# EAGLE board led16x16 (EAGLE 5.06)
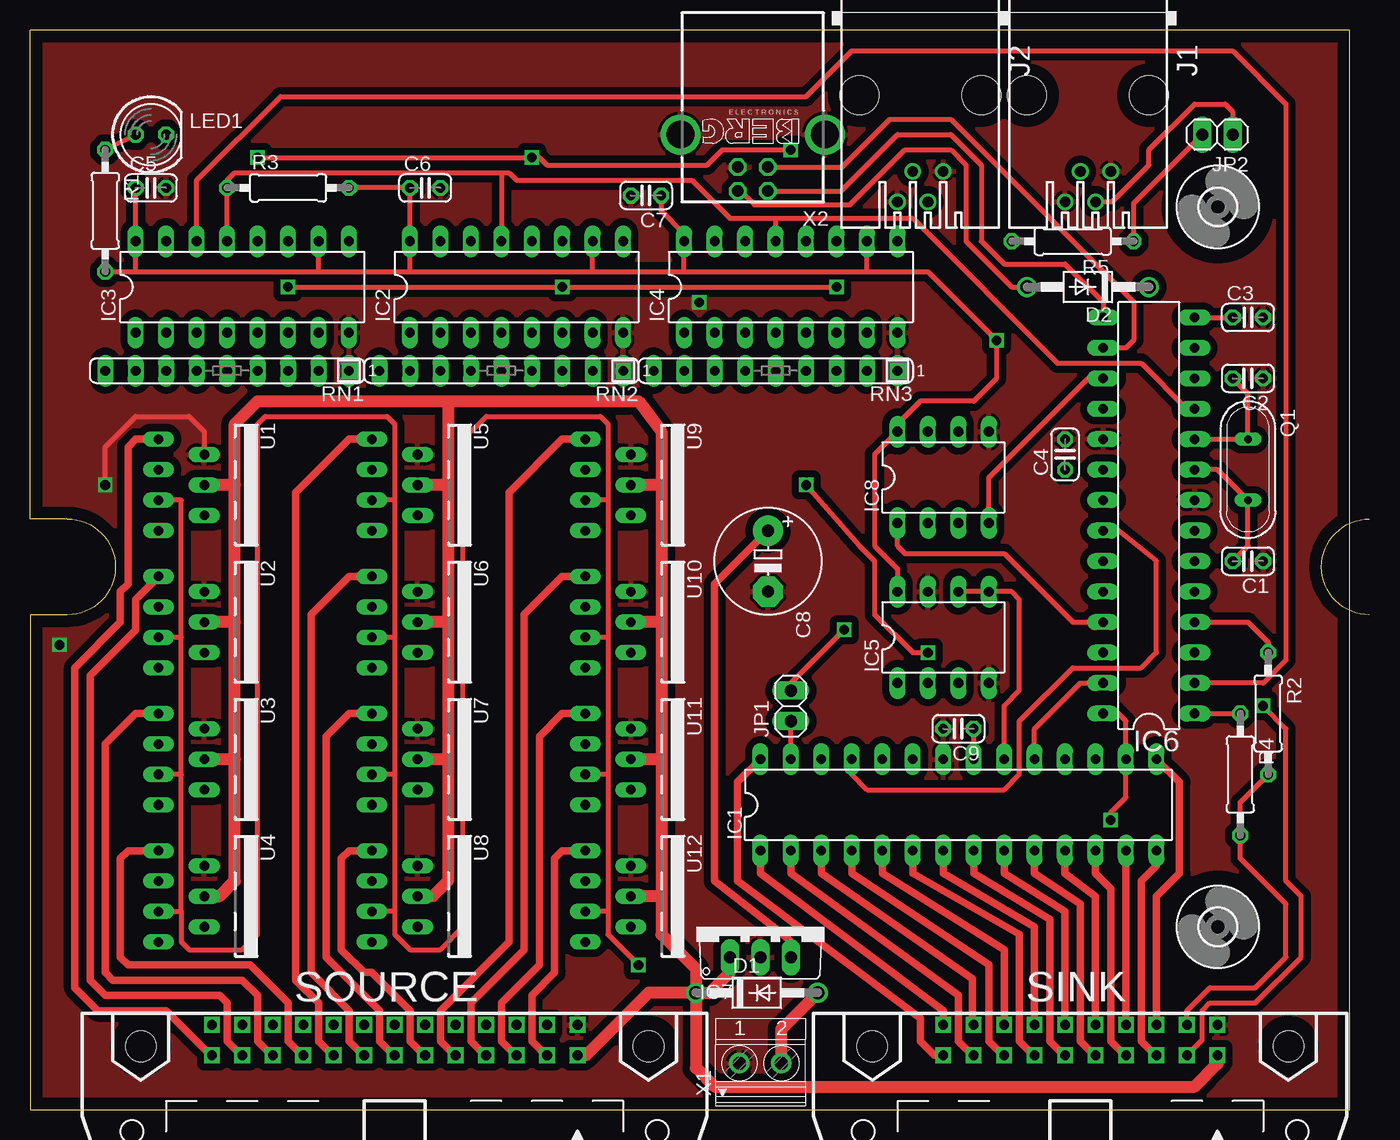
[diagram p0: board, top side]
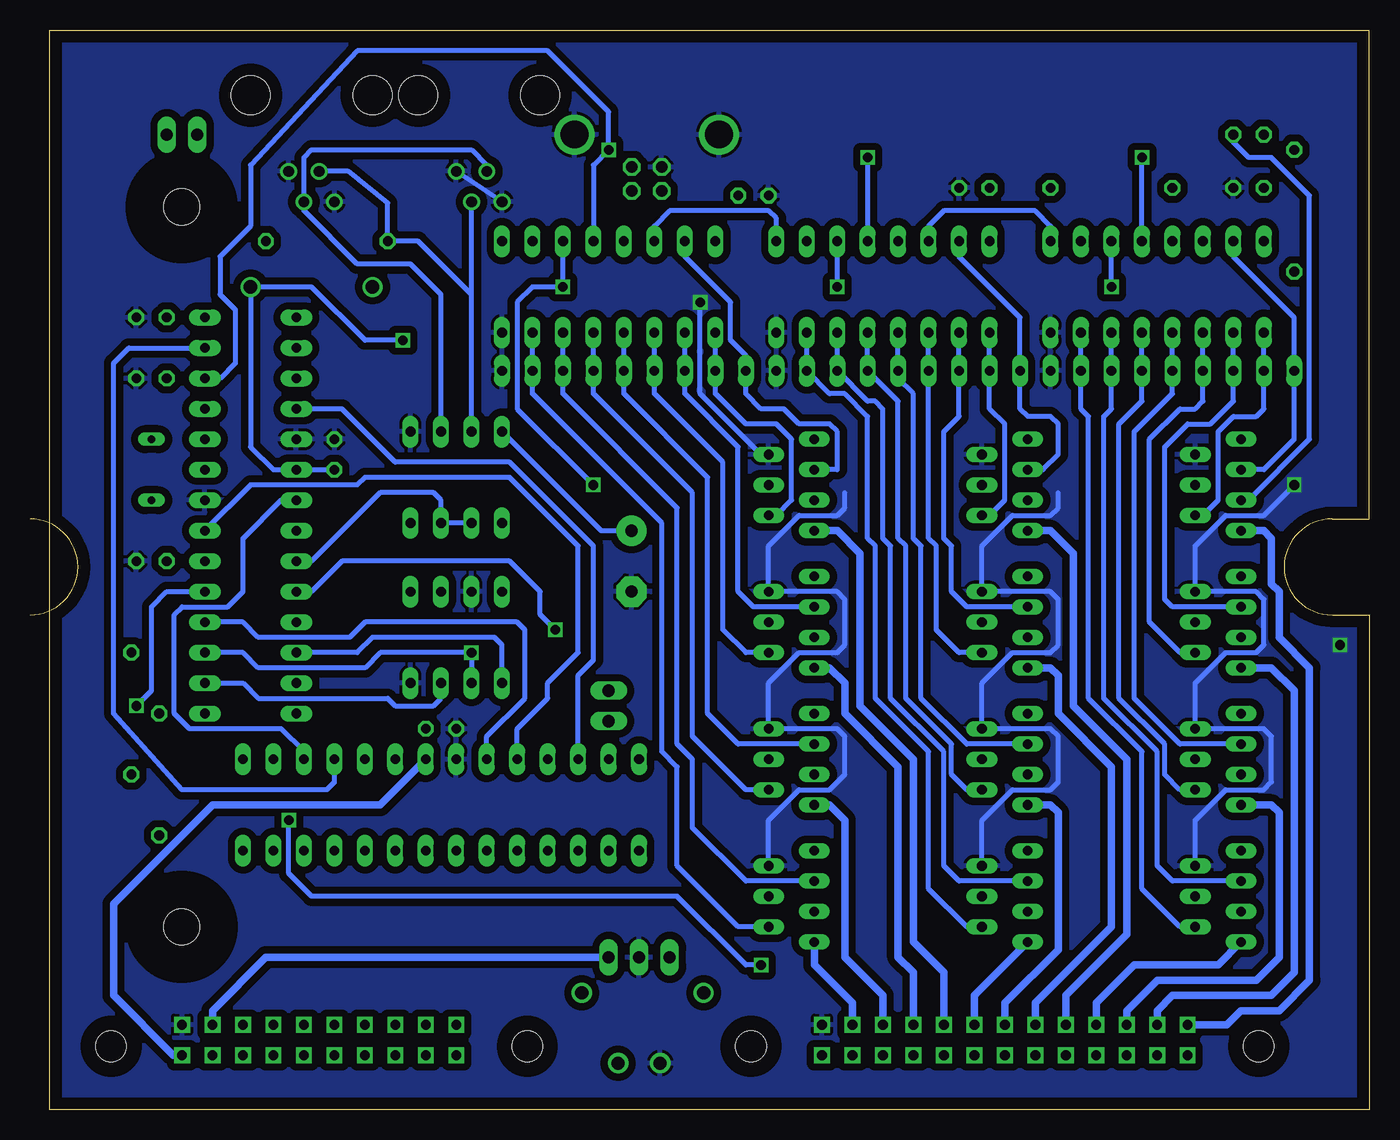
[diagram p1: board, bottom side, seen from below]

Size 111.66 x 90 mm. Coordinates in mm from the lower left corner, seen from the top.
Outline: 111.66,41.24 arc-180 111.66,49.24
Outline: 0,0 110,0 110,90 0,90 0,49.24 3.12,49.24 arc-180 3.12,41.24 0,41.24 0,0
Copper layers (1*16): Top 0.035mm / dielectric 1.5mm / Bottom 0.035mm
Design rules "10mils": minimum track width 10mil, minimum drill 24mil, track to track 10mil, track to pad 10mil, pad to pad 10mil, via to via 10mil, smd to smd 10mil, copper to edge 40mil, drill to drill 10mil, minimum pad ring 10mil, minimum via ring 8mil, stop-mask expansion 0mil, vias tented up to drill 0mil, thermal gap 10mil

## Footprints (pad centres in the part's own frame; a part is rotated, then mirrored left to right if it is on the bottom)
C025-024X044 = drill 0.813 octagon: 1 -1.27,0; 2 1.27,0
E5-8,5 = drill 1.016 pad 2.54 round: + -2.54,0 | drill 1.016 pad 2.54 octagon: - 2.54,0
DO41-10 = drill 1.118 round: A 5.08,0; C -5.08,0
3,0 = hole 3: 0,0
IC-PACKAGE_DIL28-3 = drill 0.813 long: 1 -16.51,-3.81; 2 -13.97,-3.81; 3 -11.43,-3.81; 4 -8.89,-3.81; 5 -6.35,-3.81; 6 -3.81,-3.81; 7 -1.27,-3.81; 8 1.27,-3.81; 9 3.81,-3.81; 10 6.35,-3.81; 11 8.89,-3.81; 12 11.43,-3.81; 13 13.97,-3.81; 14 16.51,-3.81; 15 16.51,3.81; 16 13.97,3.81; 17 11.43,3.81; 18 8.89,3.81; 19 6.35,3.81; 20 3.81,3.81; 21 1.27,3.81; 22 -1.27,3.81; 23 -3.81,3.81; 24 -6.35,3.81; 25 -8.89,3.81; 26 -11.43,3.81; 27 -13.97,3.81; 28 -16.51,3.81
DIL16 = drill 0.813 long: 1 -8.89,-3.81; 2 -6.35,-3.81; 3 -3.81,-3.81; 4 -1.27,-3.81; 5 1.27,-3.81; 6 3.81,-3.81; 7 6.35,-3.81; 8 8.89,-3.81; 9 8.89,3.81; 10 6.35,3.81; 11 3.81,3.81; 12 1.27,3.81; 13 -1.27,3.81; 14 -3.81,3.81; 15 -6.35,3.81; 16 -8.89,3.81
DIL08 = drill 0.813 long: 1 -3.81,-3.81; 2 -1.27,-3.81; 3 1.27,-3.81; 4 3.81,-3.81; 5 3.81,3.81; 6 1.27,3.81; 7 -1.27,3.81; 8 -3.81,3.81
DIL28-3 = drill 0.813 long: 1 -16.51,-3.81; 2 -13.97,-3.81; 3 -11.43,-3.81; 4 -8.89,-3.81; 5 -6.35,-3.81; 6 -3.81,-3.81; 7 -1.27,-3.81; 8 1.27,-3.81; 9 3.81,-3.81; 10 6.35,-3.81; 11 8.89,-3.81; 12 11.43,-3.81; 13 13.97,-3.81; 14 16.51,-3.81; 15 16.51,3.81; 16 13.97,3.81; 17 11.43,3.81; 18 8.89,3.81; 19 6.35,3.81; 20 3.81,3.81; 21 1.27,3.81; 22 -1.27,3.81; 23 -3.81,3.81; 24 -6.35,3.81; 25 -8.89,3.81; 26 -11.43,3.81; 27 -13.97,3.81; 28 -16.51,3.81
TO220V = drill 1.016 long: 1 -2.54,-2.54; 2 0,-2.54; 3 2.54,-2.54
520250-2 = drill 0.889 round: 1 -1.905,6.35; 2 -0.635,8.89; 3 0.635,6.35; 4 1.905,8.89 | hole 3.251: -5.08,0; 5.08,0
1X02 = drill 1.016 long: 1 -1.27,0; 2 1.27,0
LED5MM = drill 0.813 octagon: A -1.27,0; K 1.27,0
QS = drill 0.61 long: 1 -2.54,0; 2 2.54,0
0207/10 = drill 0.813 octagon: 1 -5.08,0; 2 5.08,0
SIL9 = drill 0.813 long: 1 -10.16,0; 2 -7.62,0; 3 -5.08,0; 4 -2.54,0; 5 0,0; 6 2.54,0; 7 5.08,0; 8 7.62,0; 9 10.16,0
3M_20L = drill 0.813 square: 1 -11.43,-5.08; 2 -11.43,-2.54; 3 -8.89,-5.08; 4 -8.89,-2.54; 5 -6.35,-5.08; 6 -6.35,-2.54; 7 -3.81,-5.08; 8 -3.81,-2.54; 9 -1.27,-5.08; 10 -1.27,-2.54; 11 1.27,-5.08; 12 1.27,-2.54; 13 3.81,-5.08; 14 3.81,-2.54; 15 6.35,-5.08; 16 6.35,-2.54; 17 8.89,-5.08; 18 8.89,-2.54; 19 11.43,-5.08; 20 11.43,-2.54 | hole 2.54: -17.348,-3.277; 17.348,-3.277
3M_26L = drill 0.813 square: 1 -15.24,-5.08; 2 -15.24,-2.54; 3 -12.7,-5.08; 4 -12.7,-2.54; 5 -10.16,-5.08; 6 -10.16,-2.54; 7 -7.62,-5.08; 8 -7.62,-2.54; 9 -5.08,-5.08; 10 -5.08,-2.54; 11 -2.54,-5.08; 12 -2.54,-2.54; 13 0,-5.08; 14 0,-2.54; 15 2.54,-5.08; 16 2.54,-2.54; 17 5.08,-5.08; 18 5.08,-2.54; 19 7.62,-5.08; 20 7.62,-2.54; 21 10.16,-5.08; 22 10.16,-2.54; 23 12.7,-5.08; 24 12.7,-2.54; 25 15.24,-5.08; 26 15.24,-2.54 | hole 2.54: -21.158,-3.277; 21.158,-3.277
ITS621L1 = drill 0.8 long: 1 -3.81,-8.255; 2 -2.54,-4.445; 3 -1.27,-8.255; 4 0,-4.445; 5 1.27,-8.255; 6 2.54,-4.445; 7 3.81,-8.255
1751248 = drill 1.1 pad 1.7 round: 1 -1.75,-0.1; 2 1.75,-0.1
PN61729-S = drill 0.95 octagon: 1 1.25,4.71; 2 -1.25,4.71; 3 -1.25,2.71; 4 1.25,2.71 | drill 2.3 pad 2.9 round: S1 -6.02,0; S2 6.02,0

## Placement (x,y rotation side)
C1  15pF  [C025-024X044]  101.52,45.72 180 top
C2  15pF  [C025-024X044]  101.52,60.96 180 top
C3  100nF  [C025-024X044]  101.52,66.04 0 top
C4  100nF  [C025-024X044]  86.28,54.61 90 top
C5  100nF  [C025-024X044]  10.08,76.83 0 top
C6  100nF  [C025-024X044]  32.94,76.83 0 top
C7  100nF  [C025-024X044]  51.35,76.2 180 top
C8  4.7uF  [E5-8,5]  61.52,45.72 270 top
C9  100nF  [C025-024X044]  77.39,31.75 180 top
D1  BAT49  [DO41-10]  60.58,9.74 0 top
D2  BAT49  [DO41-10]  88.19,68.58 180 top
H1  MOUNT-HOLE3.0  [3,0]  99,15.24 0 top
H3  MOUNT-HOLE3.0  [3,0]  99,75.25 0 top
IC1  TLC5940  [IC-PACKAGE_DIL28-3]  77.39,25.4 0 top
IC2  74HCT595N  [DIL16]  40.56,68.58 0 top
IC3  74HCT595N  [DIL16]  17.7,68.58 0 top
IC4  74HCT595N  [DIL16]  63.42,68.58 0 top
IC5  MCP4161P  [DIL08]  76.12,39.37 0 top
IC6  PIC18F2550_28DIP  [DIL28-3]  93.27,49.53 90 top
IC7  7805TV  [TO220V]  60.88,15.24 0 top
IC8  LTC485N  [DIL08]  76.12,52.7 0 top
J1  RS485  [520250-2]  88.19,84.56 180 top
J2  RS485  [520250-2]  74.22,84.56 180 top
JP1  VPRG  [1X02]  63.42,33.66 90 top
JP2  rs485  [1X02]  98.98,81.28 180 top
LED1  [LED5MM]  10.08,81.28 0 top
Q1  20MHz  [QS]  101.52,53.34 270 top
R1  470  [0207/10]  6.27,74.93 270 top
R2  10k  [0207/10]  103.2,33.02 270 top
R3  10k  [0207/10]  21.51,76.83 0 top
R4  10k  [0207/10]  100.89,27.94 270 top
R5  10k  [0207/10]  86.92,72.39 180 top
RN1  10k  [SIL9]  16.43,61.59 180 top
RN2  10k  [SIL9]  39.29,61.59 180 top
RN3  10k  [SIL9]  62.15,61.59 180 top
SINK  [3M_20L]  87.55,2 180 top
SOURCE  [3M_26L]  30.4,2 180 top
U1  ITS621L1  [ITS621L1]  18.97,52.07 270 top
U2  ITS621L1  [ITS621L1]  18.97,40.64 270 top
U3  ITS621L1  [ITS621L1]  18.97,29.21 270 top
U4  ITS621L1  [ITS621L1]  18.97,17.78 270 top
U5  ITS621L1  [ITS621L1]  36.75,52.07 270 top
U6  ITS621L1  [ITS621L1]  36.75,40.64 270 top
U7  ITS621L1  [ITS621L1]  36.75,29.21 270 top
U8  ITS621L1  [ITS621L1]  36.75,17.78 270 top
U9  ITS621L1  [ITS621L1]  54.53,52.07 270 top
U10  ITS621L1  [ITS621L1]  54.53,40.64 270 top
U11  ITS621L1  [ITS621L1]  54.53,29.21 270 top
U12  ITS621L1  [ITS621L1]  54.53,17.78 270 top
X1  1751248  [1751248]  60.88,3.97 0 top
X2  PN61729-S  [PN61729-S]  60.24,81.28 180 top

## Library data of the parts
C1-C7 C9 R1-R5 = rcl2
C8 = rcl
D1 D2 = diode
H1 H3 = holes
IC1 = TLC5940
IC2-IC4 = 74xx-eu
IC5 = MCP4161
IC6 = microchip
IC7 = linear
IC8 = linear-technology; OC_FARNELL: unknown; OC_NEWARK: unknown
J1 J2 = con-amp
JP1 JP2 = pinhead-2
LED1 = led
Q1 = special
RN1-RN3 = resistor-sil
SINK = con-harting-ml; OC_FARNELL: unknown; OC_NEWARK: unknown
SOURCE = con-harting-ml
U1-U12 = ITS621L1
X1 = con-phoenix-350
X2 = con-berg

## Nets
!FAULT: IC1.16 IC6.28 LED1.K U1.5 U2.5 U3.5 U4.5 U5.5 U6.5 U7.5 U8.5 U9.5 U10.5 U11.5 U12.5
+5V: C4.1 C5.1 C6.1 C7.1 C8.+ D2.C IC2.10 IC2.16 IC3.10 IC3.16 IC4.10 IC4.16 IC5.8 IC6.20 IC7.3 IC8.8 R1.2 R2.2 R3.2 R4.2 SINK.3
BLANK: IC1.23 IC6.4 R2.1
D+: IC6.16 X2.3
D-: IC6.15 X2.2
DCPRG: IC1.19 IC6.27
DE/!RE: IC6.23 IC8.2 IC8.3
EXT: IC6.5 SINK.4
GND: C1.1 C2.1 C3.2 C4.2 C5.2 C6.2 C7.2 C8.- C9.2 IC1.22 IC2.8 IC3.8 IC4.8 IC5.4 IC5.7 IC6.8 IC6.19 IC7.2 IC8.5 J1.1 J1.4 J2.1 J2.4 RN1.1 RN2.1 RN3.1 SINK.1 SOURCE.1 U1.2 U2.2 U3.2 U4.2 U5.2 U6.2 U7.2 U8.2 U9.2 U10.2 U11.2 U12.2 X1.1 X2.4 X2.S1 X2.S2
GSCLK: IC1.18 IC6.13
IREF: IC1.20 IC5.5 IC5.6
N$1: D1.A X1.2
N$2: IC2.15 RN2.9 U5.3
N$3: IC3.15 RN1.9 U1.3
N$4: IC3.1 RN1.8 U1.6
N$5: IC3.2 RN1.7 U2.3
N$6: IC3.3 RN1.6 U2.6
N$7: IC3.7 RN1.2 U4.6
N$8: IC3.6 RN1.3 U4.3
N$9: IC3.5 RN1.4 U3.6
N$10: IC3.4 RN1.5 U3.3
N$11: IC2.1 RN2.8 U5.6
N$12: IC2.2 RN2.7 U6.3
N$13: IC2.3 RN2.6 U6.6
N$14: IC2.4 RN2.5 U7.3
N$15: IC2.5 RN2.4 U7.6
N$16: IC2.6 RN2.3 U8.3
N$17: IC2.7 RN2.2 U8.6
N$18: IC4.3 RN3.6 U10.6
N$19: IC4.2 RN3.7 U10.3
N$20: IC4.1 RN3.8 U9.6
N$21: IC4.15 RN3.9 U9.3
N$22: IC4.4 RN3.5 U11.3
N$23: IC4.5 RN3.4 U11.6
N$24: IC4.6 RN3.3 U12.3
N$25: IC4.7 RN3.2 U12.6
N$26: C3.1 IC6.14
N$27: IC2.9 IC4.14
N$28: IC2.14 IC3.9
N$29: D2.A X2.1
N$30: IC1.27 JP1.1
N$31: IC6.1 R4.1
N$32: IC8.6 J1.2 J2.3 JP2.1
N$33: IC8.7 J1.3 J2.2 R5.2
N$34: JP2.2 R5.1
N$35: C1.2 IC6.9 Q1.2
N$36: C2.2 IC6.10 Q1.1
N$37: LED1.A R1.1
OUT0: IC1.28 SINK.20
OUT1: IC1.1 SINK.19
OUT2: IC1.2 SINK.18
OUT3: IC1.3 SINK.17
OUT4: IC1.4 SINK.16
OUT5: IC1.5 SINK.15
OUT6: IC1.6 SINK.14
OUT7: IC1.7 SINK.13
OUT8: IC1.8 SINK.12
OUT9: IC1.9 SINK.11
OUT10: IC1.10 SINK.10
OUT11: IC1.11 SINK.9
OUT12: IC1.12 SINK.8
OUT13: IC1.13 SINK.7
OUT14: IC1.14 SINK.6
OUT15: IC1.15 SINK.5
POT_!CS: IC5.1 IC6.26
RAW0: SOURCE.26 U1.1
RAW1: SOURCE.25 U1.7
RAW2: SOURCE.24 U2.1
RAW3: SOURCE.23 U2.7
RAW4: SOURCE.22 U3.1
RAW5: SOURCE.21 U3.7
RAW6: SOURCE.20 U4.1
RAW7: SOURCE.19 U4.7
RAW8: SOURCE.18 U5.1
RAW9: SOURCE.17 U5.7
RAW10: SOURCE.16 U6.1
RAW11: SOURCE.15 U6.7
RAW12: SOURCE.14 U7.1
RAW13: SOURCE.13 U7.7
RAW14: SOURCE.12 U8.1
RAW15: SOURCE.11 U8.7
RAW16: SOURCE.10 U9.1
RAW17: SOURCE.9 U9.7
RAW18: SOURCE.8 U10.1
RAW19: SOURCE.7 U10.7
RAW20: SOURCE.6 U11.1
RAW21: SOURCE.5 U11.7
RAW22: SOURCE.4 U12.1
RAW23: SOURCE.3 U12.7
RAW_!OE: IC2.13 IC3.13 IC4.13 IC6.11 R3.1
RAW_RCK: IC2.12 IC3.12 IC4.12 IC6.12
RX: IC6.25 IC8.1
SCK: IC1.25 IC6.22
SCK2: IC2.11 IC3.11 IC4.11 IC5.2 IC6.3
SDI: IC1.17 IC6.21
SDO: IC1.26 IC6.18
SDO2: IC3.14 IC5.3 IC6.2
TX: IC6.17 IC8.4
VCC: C9.1 D1.C IC1.21 IC7.1 SINK.2 SOURCE.2 U1.4 U2.4 U3.4 U4.4 U5.4 U6.4 U7.4 U8.4 U9.4 U10.4 U11.4 U12.4
VPRG: IC6.24 JP1.2
XLAT: IC1.24 IC6.7

## Tracks (layer width: path | path; a pad name or v marks a point on that pad's centre or on a via)
!FAULT  (via drill 0.8)
  Top 0.406: 12.62,27.94 12.62,39.37 | 12.62,39.37 12.62,50.8 U1.5 | 48.18,50.8 48.18,57.15 47.55,57.78 38.02,57.78 36.11,55.88 36.11,15.24 34.21,13.34 31.67,13.34 30.4,14.61 30.4,16.51 | 48.18,50.8 48.18,39.37 | 48.18,39.37 48.18,27.94 | 30.4,50.8 30.4,57.15 29.77,57.78 19.61,57.78 18.97,57.15 18.97,14.61 17.7,13.34 13.26,13.34 12.62,13.97 12.62,16.51 | 30.4,50.8 30.4,39.37 | 30.4,39.37 30.4,27.94 | 30.4,27.94 30.4,16.51 | 12.62,16.51 12.62,27.94 | 48.18,27.94 U11.5 | 48.18,39.37 U10.5 | 48.18,50.8 U9.5 | 12.62,39.37 U2.5 | 12.62,27.94 U3.5 | 30.4,50.8 U5.5 | 30.4,39.37 U6.5 | 30.4,27.94 U7.5 | 30.4,16.51 U8.5 | 48.18,27.94 48.18,16.51 | 48.18,16.51 48.18,14.61 v50.72,12.06 | 48.18,16.51 U12.5 | IC6.28 90.72,33.02 91.36,32.38 IC1.16 91.36,26.04 90.09,24.77 v90.09,24.13 | U4.5 12.62,16.51
  Bottom 0.406: v50.72,12.06 51.99,12.06 57.7,17.78 88.19,17.78 90.09,19.68 v90.09,24.13 | LED1.K 11.35,80.64 10.08,79.38 8.18,79.38 5,76.2 5,55.88 10.08,50.8 U1.5
+5V  (via drill 0.8)
  Top 0.406: 24.05,69.85 31.67,69.85 | 31.67,69.85 46.91,69.85 | 46.91,69.85 54.53,69.85 | 54.53,69.85 69.77,69.85 | 69.77,69.85 IC4.10 | 54.53,69.85 IC4.16 54.53,73.03 52.62,74.93 C7.1 | 24.05,69.85 IC3.10 | 46.91,69.85 IC2.10 | 31.67,69.85 IC2.16 C6.1 R3.2 | C5.1 IC3.16 8.81,69.85 | 69.77,69.85 74.85,69.85 v80.56,64.14 80.56,60.96 78.66,59.05 74.22,59.05 72.31,57.15 IC8.8 70.41,54.61 70.41,46.99 72.31,45.09 IC5.8 | R2.2 100.89,25.62 R4.2 100.89,20.95 104.69,17.14 104.69,12.7 102.16,10.16 98.34,10.16 96.44,8.26 SINK.3 | 8.81,69.85 24.05,69.85 | R1.2 8.81,69.85
  Top 0.61: IC7.3 63.42,13.97 62.78,14.61 57.07,19.05 57.07,43.81 C8.+
  Bottom 0.406: C4.1 IC6.20 91.36,53.34 93.27,55.24 D2.C 88.19,68.58 83.74,64.14 v80.56,64.14 | C8.+ 64.06,48.26 IC8.8
  Bottom 0.61: IC7.3 92,12.7 96.44,8.26 SINK.3
BLANK
  Top 0.406: R2.1 103.2,38.95 101.52,40.64 IC6.4
  Bottom 0.406: IC6.4 93.9,40.64 92.63,39.37 85.01,39.37 83.74,40.64 71.04,40.64 70.41,40.01 70.41,34.29 73.58,31.11 IC1.23
D+
  Top 0.406: IC6.16 91.36,63.5 92,64.14 92,67.31 76.75,82.55 71.67,82.55 67.69,78.57 X2.3
D-
  Top 0.406: IC6.15 89.45,67.31 86.28,70.48 81.2,70.48 79.3,72.39 79.3,78.74 76.75,81.28 72.31,81.28 67.6,76.57 X2.2
DCPRG
  Top 0.406: IC1.19 83.74,31.75 87.55,35.56 IC6.27
DE/!RE
  Bottom 0.406: IC8.2 IC8.3 77.39,50.8 78.03,51.44 82.47,51.44 88.19,45.72 IC6.23
EXT  (via drill 0.8)
  Top 0.406: v102.79,33.66 104.69,31.75 104.69,19.05 105.97,17.78 105.97,12.7 102.16,8.89 98.34,8.89 97.71,8.26 97.71,5.81 SINK.4
  Bottom 0.406: IC6.5 100.25,43.18 101.52,41.91 101.52,34.92 v102.79,33.66
GND  (via drill 0.8)
  Top 0.406: v6.27,52.07 6.27,55.24 8.81,57.78 13.26,57.78 14.53,56.52 U1.2
  Bottom 0.406: U4.2 14.53,24.13 11.98,26.67 8.81,26.67 8.18,27.3 8.18,31.11 8.81,31.75 U3.2 14.53,35.56 11.98,38.1 9.45,38.1 8.81,38.73 8.81,42.55 9.45,43.18 U2.2 14.53,46.99 11.98,49.53 8.81,49.53 v6.27,52.07 | U8.2 32.3,24.13 29.77,26.67 26.59,26.67 25.95,27.3 25.95,31.11 26.59,31.75 U7.2 32.3,35.56 29.77,38.1 26.59,38.1 25.95,38.73 25.95,42.55 26.59,43.18 U6.2 32.3,46.99 29.77,49.53 26.59,49.53 25.95,50.16 25.95,51.44 | U12.2 50.09,24.13 47.55,26.67 45.01,26.67 43.73,27.94 43.73,31.11 44.37,31.75 U11.2 50.09,35.56 47.55,38.1 44.37,38.1 43.73,38.73 43.73,42.55 44.37,43.18 U10.2 50.09,46.99 47.55,49.53 44.37,49.53 43.73,50.16 43.73,51.44 | U9.2 50.72,54.61 55.8,59.69 v55.8,67.31 | J2.4 J2.1
  other vias: 2.46,38.73
  pour Bottom (isolate 0.61): 0,90 0,0 110,0 110,90
  pour Top (isolate 0.61): 0,90 0,0 110,0 110,90
GSCLK
  Bottom 0.406: IC6.13 103.42,63.5 104.69,62.23 104.69,33.02 98.98,26.67 86.92,26.67 86.28,27.3 IC1.18
IREF
  Top 0.406: IC5.6 IC5.5 81.83,43.18 82.47,42.55 82.47,34.92 81.2,33.66 IC1.20
N$1
  Top 1.016: X1.2 62.63,6.71 D1.A
N$2
  Bottom 0.406: U5.3 27.23,53.34 25.95,54.61 25.95,57.15 26.59,57.78 28.5,57.78 29.13,58.42 RN2.9 29.13,66.04 34.21,71.12 IC2.15
N$3
  Bottom 0.406: U1.3 8.81,53.34 6.27,55.88 RN1.9 6.27,66.04 11.35,71.12 IC3.15
N$4
  Bottom 0.406: U1.6 13.89,49.53 12.62,50.8 12.62,56.52 11.35,57.78 9.45,57.78 8.81,58.42 RN1.8 IC3.1
N$5
  Bottom 0.406: U2.3 16.43,41.91 17.06,42.55 17.06,55.24 15.16,57.15 13.26,57.15 11.35,59.05 RN1.7 IC3.2
N$6
  Bottom 0.406: U2.6 15.79,38.1 18.34,40.64 18.34,55.88 15.79,58.42 14.53,58.42 13.89,59.05 RN1.6 IC3.3
N$7
  Bottom 0.406: U4.6 15.79,15.24 18.97,18.41 18.97,29.84 23.41,34.29 23.41,57.78 24.05,58.42 RN1.2 IC3.7
N$8
  Bottom 0.406: U4.3 16.43,19.05 17.7,20.32 17.7,29.84 22.14,34.29 22.14,57.78 21.51,58.42 RN1.3 IC3.6
N$9
  Bottom 0.406: U3.6 15.79,26.67 17.06,27.94 17.06,30.48 20.88,34.29 20.88,57.15 18.97,59.05 RN1.4 IC3.5
N$10
  Bottom 0.406: U3.3 15.79,30.48 19.61,34.29 19.61,56.52 16.43,59.69 RN1.5 IC3.4
N$11
  Bottom 0.406: U5.6 31.67,49.53 30.4,50.8 30.4,57.15 31.67,58.42 RN2.8 IC2.1
N$12
  Bottom 0.406: U6.3 33.58,41.91 34.84,43.18 34.84,46.99 35.48,47.62 35.48,56.52 34.21,57.78 RN2.7 IC2.2
N$13
  Bottom 0.406: U6.6 34.21,38.1 36.11,40.01 36.11,46.99 36.75,47.62 RN2.6 IC2.3
N$14
  Bottom 0.406: U7.3 33.58,30.48 37.38,34.29 37.38,46.99 38.02,47.62 38.02,59.69 39.29,60.96 RN2.5 IC2.4
N$15
  Bottom 0.406: U7.6 33.58,26.67 34.84,27.94 34.84,30.48 38.66,34.29 38.66,46.99 39.29,47.62 39.29,59.05 RN2.4 IC2.5
N$16
  Bottom 0.406: U8.3 34.21,19.05 35.48,20.32 35.48,29.84 39.92,34.29 39.92,46.99 40.56,47.62 40.56,58.42 41.2,59.05 41.83,59.05 RN2.3 IC2.6
N$17
  Bottom 0.406: U8.6 33.58,15.24 36.75,18.41 36.75,29.84 41.2,34.29 41.2,46.99 41.83,47.62 41.83,57.78 43.73,59.69 45.01,59.69 RN2.2 IC2.7
N$18
  Bottom 0.406: U10.6 51.99,38.1 53.9,40.01 53.9,53.98 59.61,59.69 RN3.6 IC4.3
N$19
  Bottom 0.406: U10.3 51.35,41.91 52.62,43.18 52.62,55.24 57.07,59.69 RN3.7 IC4.2
N$20
  Bottom 0.406: U9.6 49.45,49.53 48.18,50.8 48.18,55.88 49.45,57.15 51.99,57.15 54.53,59.69 RN3.8 IC4.1
N$21
  Bottom 0.406: U9.3 44.37,53.34 44.37,56.52 45.01,57.15 47.55,57.15 48.81,58.42 50.72,58.42 51.99,59.69 RN3.9 51.99,62.87 53.26,64.14 53.26,67.31 57.07,71.12 IC4.15
N$22
  Bottom 0.406: U11.3 52.62,30.48 55.16,33.02 55.16,52.7 62.15,59.69 RN3.5 IC4.4
N$23
  Bottom 0.406: U11.6 51.99,26.67 56.44,31.11 56.44,51.44 64.69,59.69 RN3.4 IC4.5
N$24
  Bottom 0.406: U12.3 51.99,19.05 56.44,23.5 56.44,29.21 57.7,30.48 57.7,50.16 67.23,59.69 RN3.3 IC4.6
N$25
  Bottom 0.406: U12.6 52.62,15.24 57.7,20.32 57.7,28.57 58.98,29.84 58.98,48.9 69.77,59.69 RN3.2 IC4.7
N$26
  Top 0.406: IC6.14 C3.1
N$27
  Bottom 0.406: IC2.9 49.45,74.3 50.09,74.93 58.34,74.93 59.61,73.66 IC4.14
N$28
  Bottom 0.406: IC3.9 26.59,73.66 27.86,74.93 35.48,74.93 36.75,73.66 IC2.14
N$29
  Top 0.406: D2.A 81.83,68.58 78.03,72.39 78.03,78.74 76.75,80.01 72.94,80.01 68.37,75.43 60.38,75.43 59.24,76.57 X2.1
N$30
  Top 0.406: IC1.27 JP1.1
N$31
  Top 0.406: IC6.1 R4.1
N$32
  Top 0.406: J1.2 90.2,75.67 93.27,78.74 93.27,80.01 97.08,83.82 99.61,83.82 100.25,83.19 JP2.1
  Bottom 0.406: IC8.6 77.39,67.94 79.93,70.48 84.38,70.48 88.82,74.93 J1.2 88.82,79.38 88.19,80.01 74.85,80.01 73.58,78.74 J2.3
N$33
  Bottom 0.406: J1.3 85.12,78.22 81.83,75.56 R5.2 79.3,72.39 74.85,67.94 | IC8.7 74.85,67.94 | 74.85,67.94 J2.2
N$34
  Top 0.406: R5.1 92,75.56 JP2.2
N$35
  Top 0.406: IC6.9 98.98,53.34 Q1.2 101.52,46.99 C1.2
N$36
  Top 0.406: IC6.10 Q1.1 101.52,59.69 C2.2
N$37
  Top 0.406: R1.1 LED1.A
OUT0
  Top 0.61: IC1.28 58.98,27.3 58.98,19.05 74.22,7.62 74.22,5.71 75.39,4.54 SINK.20
OUT1
  Top 0.61: SINK.19 76.12,8.26 60.88,19.68 IC1.1
OUT2
  Top 0.61: SINK.18 78.56,4.54 77.39,5.71 77.39,9.53 63.42,19.68 IC1.2
OUT3
  Top 0.61: SINK.17 78.56,7.08 78.56,10.89 65.96,19.68 IC1.3
OUT4
  Top 0.61: SINK.16 81.11,4.54 79.93,5.71 79.93,12.06 68.5,19.68 IC1.4
OUT5
  Top 0.61: SINK.15 81.2,13.34 71.04,19.68 IC1.5
OUT6
  Top 0.61: SINK.14 83.64,4.54 82.47,5.71 82.47,14.61 73.58,19.68 IC1.6
OUT7
  Top 0.61: SINK.13 83.74,15.24 76.12,19.68 IC1.7
OUT8
  Top 0.61: SINK.12 86.19,4.54 85.01,5.71 85.01,15.88 78.66,19.68 IC1.8
OUT9
  Top 0.61: SINK.11 86.28,16.51 81.2,19.68 IC1.9
OUT10
  Top 0.61: IC1.10 83.74,19.68 87.55,17.14 87.55,5.71 88.72,4.54 SINK.10
OUT11
  Top 0.61: SINK.9 88.82,17.78 86.28,19.68 IC1.11
OUT12
  Top 0.61: IC1.12 88.82,19.68 90.09,18.41 90.09,5.71 91.27,4.54 SINK.8
OUT13
  Top 0.61: SINK.7 IC1.13
OUT14
  Top 0.61: IC1.14 93.9,20.32 92.63,19.05 92.63,5.71 93.81,4.54 SINK.6
OUT15
  Top 0.61: SINK.5 93.9,17.78 95.81,19.68 95.81,27.3 IC1.15
POT_!CS
  Bottom 0.406: IC6.26 84.38,38.1 83.11,39.37 72.94,39.37 72.31,38.73 IC5.1
RAW0
  Top 0.61: SOURCE.26 15.06,4.54 11.35,8.26 5.63,8.26 3.73,10.16 3.73,36.83 7.54,40.64 7.54,43.18 8.18,43.81 8.18,55.24 8.81,55.88 U1.1
RAW1
  Bottom 0.61: SOURCE.25 11.89,7.08 10.71,8.26 7.54,8.26 5,10.79 5,36.83 7.54,39.37 7.54,43.18 8.18,43.81 8.18,47.62 8.81,48.26 U1.7
RAW2
  Top 0.61: SOURCE.24 17.61,4.54 16.43,5.71 16.43,8.89 15.79,9.53 6.27,9.53 5,10.79 5,36.2 8.81,40.01 8.81,42.55 U2.1
RAW3
  Bottom 0.61: SOURCE.23 17.7,8.26 16.43,9.53 8.18,9.53 6.27,11.43 6.27,34.92 8.18,36.83 U2.7
RAW4
  Top 0.61: SOURCE.22 20.14,4.54 18.97,5.71 18.97,9.53 17.7,10.79 6.91,10.79 6.27,11.43 6.27,30.48 8.81,33.02 U3.1
RAW5
  Bottom 0.61: SOURCE.21 20.24,8.26 17.7,10.79 9.45,10.79 7.54,12.7 7.54,24.77 8.18,25.4 U3.7
RAW6
  Top 0.61: SOURCE.20 22.68,4.54 21.51,5.71 21.51,8.89 18.34,12.06 8.18,12.06 7.54,12.7 7.54,20.95 8.18,21.59 U4.1
RAW7
  Bottom 0.61: SOURCE.19 22.78,8.89 19.61,12.06 12.62,12.06 U4.7
RAW8
  Top 0.61: SOURCE.18 25.23,4.54 24.05,5.71 24.05,8.89 22.14,10.79 22.14,51.44 26.59,55.88 U5.1
RAW9
  Bottom 0.61: SOURCE.17 25.32,9.53 20.24,14.61 20.24,29.21 24.68,33.66 24.68,46.35 26.59,48.26 U5.7
RAW10
  Top 0.61: SOURCE.16 27.77,4.54 26.59,5.71 26.59,8.26 23.41,11.43 23.41,41.27 26.59,44.45 U6.1
RAW11
  Bottom 0.61: SOURCE.15 27.86,8.89 21.51,15.24 21.51,28.57 25.95,33.02 25.95,36.2 26.59,36.83 U6.7
RAW12
  Top 0.61: SOURCE.14 30.3,4.54 29.13,5.71 29.13,8.26 24.68,12.7 24.68,31.11 26.59,33.02 U7.1
RAW13
  Bottom 0.61: SOURCE.13 30.4,8.89 25.95,13.34 25.95,24.77 26.59,25.4 U7.7
RAW14
  Top 0.61: SOURCE.12 32.84,4.54 31.67,5.71 31.67,8.26 28.5,11.43 27.86,11.43 25.95,13.34 25.95,20.95 26.59,21.59 U8.1
RAW15
  Bottom 0.61: SOURCE.11 32.94,9.53 U8.7
RAW16
  Top 0.61: SOURCE.10 35.39,4.54 34.21,5.71 34.21,8.26 39.92,13.97 39.92,51.44 44.37,55.88 U9.1
RAW17
  Bottom 0.61: SOURCE.9 35.48,11.43 38.02,13.97 38.02,29.21 42.47,33.66 42.47,46.35 44.37,48.26 U9.7
RAW18
  Top 0.61: SOURCE.8 37.92,4.54 36.75,5.71 36.75,8.89 41.2,13.34 41.2,41.27 44.37,44.45 U10.1
RAW19
  Bottom 0.61: SOURCE.7 38.02,11.43 39.29,12.7 39.29,28.57 43.73,33.02 43.73,35.56 45.01,36.83 U10.7
RAW20
  Top 0.61: SOURCE.6 40.47,4.54 39.29,5.71 39.29,8.89 42.47,12.06 42.47,31.11 44.37,33.02 U11.1
RAW21
  Bottom 0.61: SOURCE.5 40.56,9.53 43.73,12.7 43.73,24.13 45.01,25.4 U11.7
RAW22
  Top 0.61: SOURCE.4 43.01,4.54 41.83,5.71 41.83,9.53 43.73,11.43 43.73,20.95 44.37,21.59 U12.1
RAW23
  Bottom 0.61: SOURCE.3 43.1,8.89 46.27,12.06 U12.7
RAW_!OE
  Top 0.406: 39.29,78.11 17.06,78.11 16.43,77.47 R3.1 IC3.13 | 39.29,78.11 IC2.13 | IC6.11 96.44,58.42 92.63,62.23 85.64,62.23 73.58,74.3 62.15,74.3 | 39.29,78.11 39.92,78.11 40.56,77.47 55.16,77.47 58.34,74.3 62.15,74.3 | 62.15,74.3 IC4.13
RAW_RCK  (via drill 0.8)
  Top 0.406: v18.97,79.38 v41.83,79.38 42.47,79.38 43.1,78.74 56.44,78.74 57.7,80.01 v63.42,80.01
  Bottom 0.406: IC3.12 v18.97,79.38 | v41.83,79.38 IC2.12 | IC6.12 95.81,60.96 94.53,62.23 94.53,66.67 95.81,67.94 95.81,71.12 93.27,73.66 93.27,78.74 84.38,88.27 68.5,88.27 63.42,83.19 v63.42,80.01 64.69,78.74 IC4.12
RX
  Top 0.406: IC6.25 86.92,40.64 81.2,46.35 72.94,46.35 72.31,46.99 IC8.1
SCK
  Top 0.406: IC6.22 90.72,48.26 93.9,45.72 93.9,38.1 92.63,36.83 86.92,36.83 82.47,32.38 82.47,27.94 81.2,26.67 69.77,26.67 68.5,27.94 IC1.25
SCK2  (via drill 0.8)
  Top 0.406: v21.51,68.58 v44.37,68.58 v67.23,68.58 | v64.69,52.07 69.14,46.99 70.41,45.72 70.41,41.27 73.58,38.1 v74.85,38.1
  Bottom 0.406: v21.51,68.58 IC3.11 | v44.37,68.58 IC2.11 | IC4.11 v67.23,68.58 69.77,68.58 71.04,67.31 71.04,58.42 v64.69,52.07 | IC6.3 93.9,38.1 92.63,36.83 83.74,36.83 82.47,38.1 v74.85,38.1 IC5.2
SDI
  Bottom 0.406: IC6.21 90.72,50.8 93.9,47.62 93.9,43.18 95.17,41.91 98.98,41.91 99.61,41.27 99.61,33.02 98.34,31.75 90.72,31.75 88.82,29.84 IC1.17
SDO
  Bottom 0.406: IC6.18 85.64,58.42 81.2,53.98 71.67,53.98 64.69,46.99 64.69,37.47 65.96,36.2 IC1.26
SDO2
  Top 0.406: IC3.14 13.89,77.47 20.88,84.45 64.69,84.45 68.5,88.27 100.25,88.27 104.69,83.82 104.69,37.47 102.79,35.56 IC6.2
  Bottom 0.406: IC6.2 93.9,35.56 92.63,34.29 81.83,34.29 81.2,33.66 78.03,33.66 77.39,34.29 IC5.3
TX
  Top 0.406: IC8.4 79.93,52.7 88.19,60.96 IC6.17
VCC
  Top 0.406: IC1.21 C9.1
  Top 0.61: SINK.2 99.08,4.45
  Top 1.016: D1.C 55.5,11.73 52.62,14.61 52.62,17.78 | 52.62,52.07 52.62,56.52 50.72,59.05 34.84,59.05 | 52.62,52.07 52.62,40.64 | 52.62,40.64 52.62,29.21 | 52.62,29.21 52.62,17.78 | 34.84,59.05 18.97,59.05 17.06,57.15 17.06,52.07 | 17.06,29.21 17.06,19.05 15.79,17.78 U4.4 | 17.06,29.21 17.06,40.64 | 17.06,40.64 17.06,52.07 | 17.06,29.21 U3.4 | 17.06,40.64 U2.4 | 17.06,52.07 U1.4 | U8.4 33.58,17.78 34.84,19.05 34.84,29.21 | 34.84,59.05 34.84,52.07 | 34.84,52.07 34.84,40.64 | 34.84,40.64 34.84,29.21 | 34.84,29.21 U7.4 | 34.84,40.64 U6.4 | 34.84,52.07 U5.4 | 52.62,52.07 U9.4 | 52.62,40.64 U10.4 | 52.62,29.21 U11.4 | 52.62,17.78 U12.4 | SOURCE.2 46.37,4.54 51.57,9.74 D1.C | SINK.2 98.98,3.81 97.08,1.91 57.07,1.91 55.5,3.48 D1.C | IC7.1 58.34,11.43 56.65,9.74 D1.C
  Bottom 0.61: IC1.21 82.47,25.4 96.44,25.4 104.69,17.14 104.69,9.53 99.71,4.54 SINK.2
VPRG  (via drill 0.8)
  Top 0.406: v67.87,40.01 63.42,35.56 JP1.2
  Bottom 0.406: IC6.24 88.19,43.18 85.64,45.72 71.67,45.72 69.14,43.18 69.14,41.27 v67.87,40.01
XLAT
  Bottom 0.406: IC6.7 93.27,52.07 84.38,52.07 83.74,52.7 71.67,52.7 65.96,46.99 65.96,38.1 68.5,35.56 68.5,34.29 71.04,31.75 IC1.24